# Altium PCB 矩形板V1.0.pcbdoc (part 2 of 2)
Units mm, origin at the board's own origin, x right, y up, seen from the top; angles counter-clockwise.
Board outline 153.82 x 190.84 mm, 2 copper layers (Top Layer, Bottom Layer); 147 components, 203 nets, 678 pads, 268 vias.
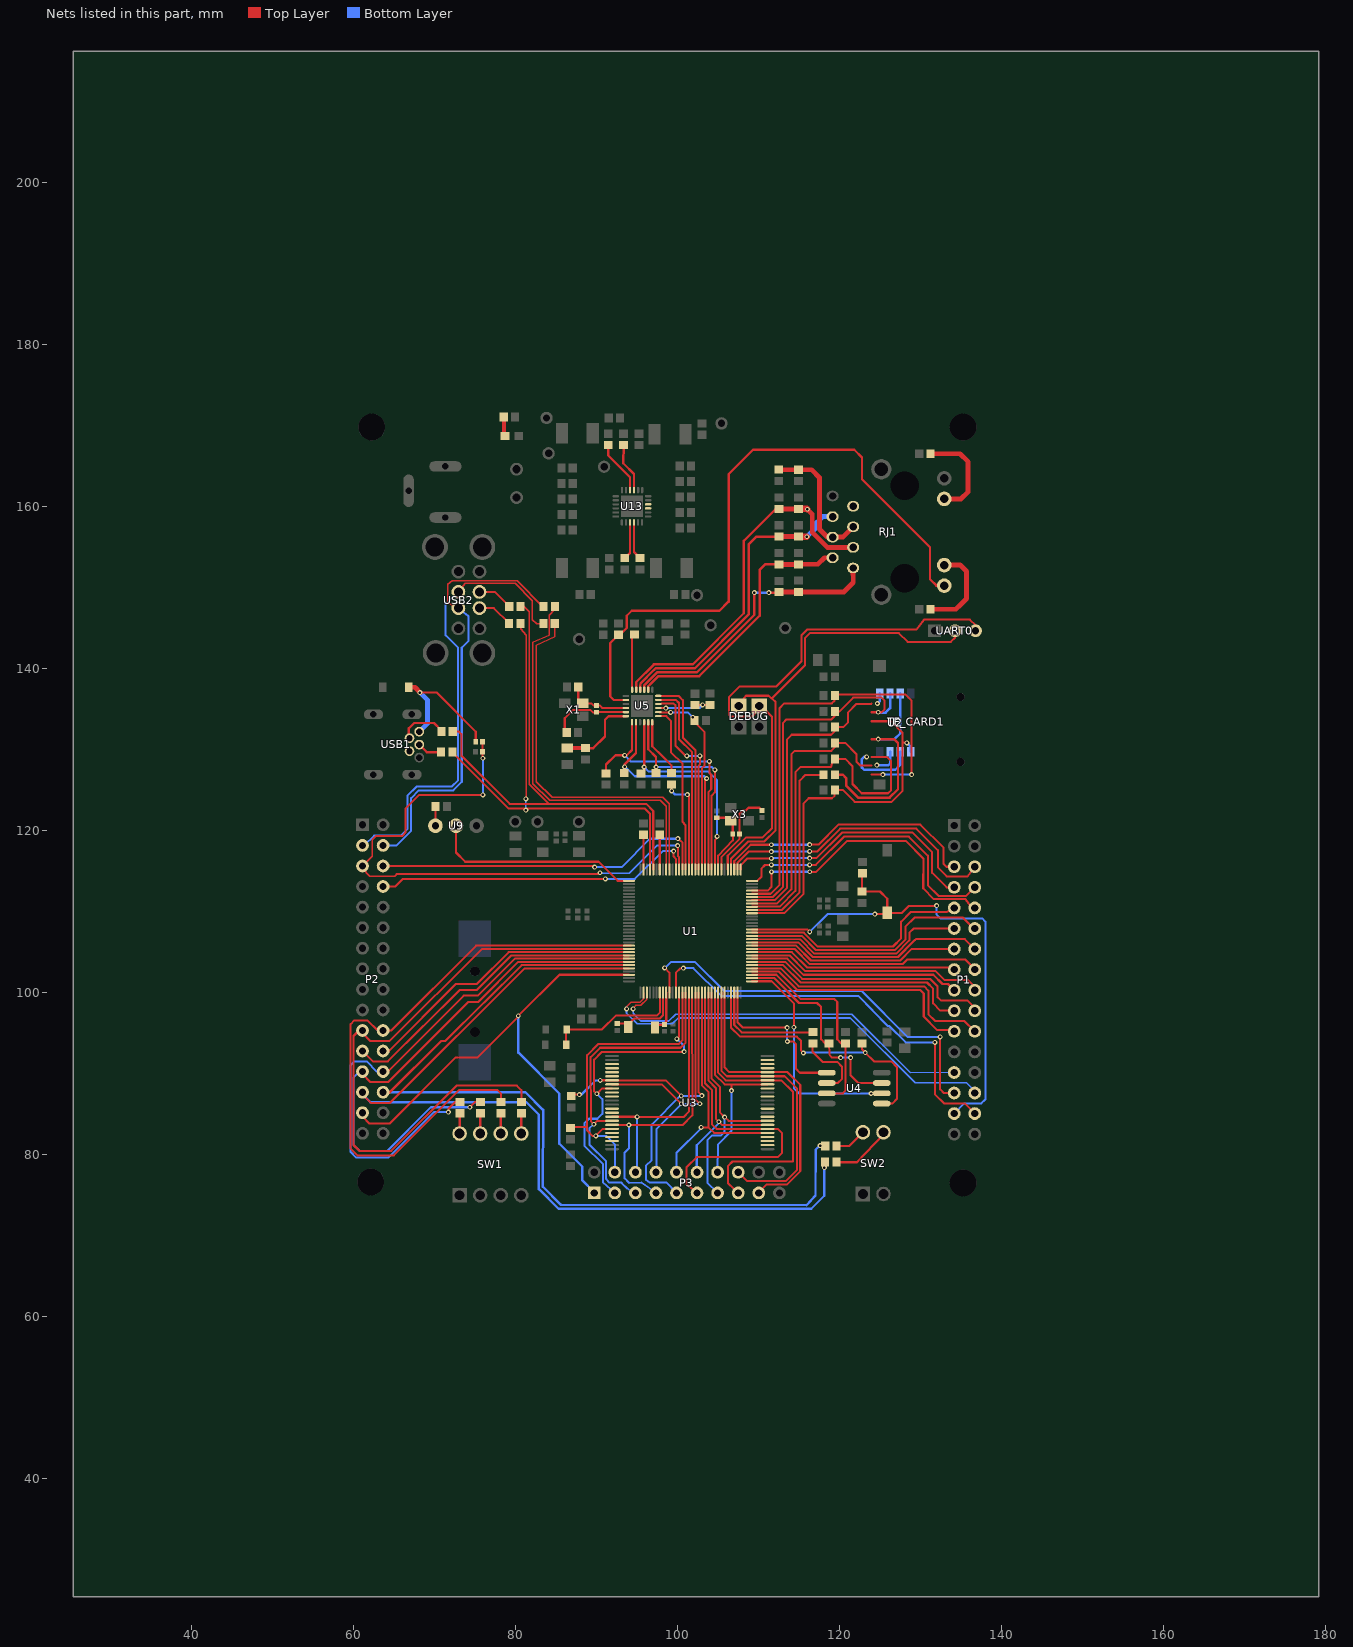
[diagram p2: the nets of this part, all layers, seen from the top]

## Via types
v1: diameter 0.61, hole 0.305, Top Layer to Bottom Layer, 268 vias

## Nets (pads, with @x,y where several pads share a name; then routed paths per layer and width w, separated by ;. In a path a pad name is that pad's centre, name@x,y a point inside that pad or via, vN(x,y) a via of type N, cw(c..) or ccw(c..) an arc to the next point about the centre after c; other vN are vias at no path point) (continued)
PB5: P1.25 U1.35 | length 47
  Top Layer w0.2: v1(94.54,98) 94.54,98.1 94.76,98.32 94.86,98.42 95.48,98.42 96.22,99.16 U1.35@96.22,100
  Bottom Layer w0.2: v1(94.54,98) 94.539,97.441 94.94,97.019 95.461,96.499 98.941,96.499 99.779,97.339 121.541,97.339 128.758,90.121 P1.25@134.181,90.141
PB6: P2.29 P3.1 U1.30 | length 67.2
  Top Layer w0.254: P2.29@61.12,85.16 61.12,84.662 61.948,83.834 64.483,83.829 72.611,92 75.341,92 80.35,97.009 v1@80.35,97.121 ; v1(80.35,97.12) 80.365,97.12 85.446,102.201 U1.30@94.021,102.201
  Bottom Layer w0.3: v1@80.35,97.121 80.358,92.582 85.43,87.51 85.43,81.33 88.26,78.5 88.26,76.819 89.731,75.351 P3.1@89.73,75.27
PB7: P1.28 U1.34 | length 52.2
  Top Layer w0.2: v1(93.72,98) 93.721,98.259 94.29,98.83 95.41,98.83 95.821,99.242 U1.34@95.821,100
  Bottom Layer w0.2: v1(93.72,98) 93.721,97.459 95.039,96.141 99.38,96.141 100.099,96.859 121.341,96.859 121.661,96.562 129.37,88.851 135.707,88.851 136.959,87.601 P1.28@136.721,87.601
PB8: P1.27 U1.42 | length 49.9
  Top Layer w0.25: v1(98.42,103.06) 99.019,102.461 U1.42@99.019,100 ; v1(132.44,94.54) 132.44,88.04 132.88,87.6 P1.27@134.18,87.6
  Bottom Layer w0.25: v1@98.42,103.052 98.501,103.052 99.2,103.763 102.199,103.763 105.76,100.199 122.761,100.199 128.46,94.5 132.441,94.5 v1@132.441,94.54
PB13: P1.10 U1.93 | length 36.8
  Top Layer w0.254: U1.93@109.22,112.601 111.161,112.601 111.62,113.06 v1(111.62,114.9) ; v1(116.34,114.92) 117.14,114.919 120.96,118.739 128.199,118.739 130.376,116.565 130.36,112.869 131.676,111.541 135.58,111.541 136.345,110.459 P1.10@136.72,110.46
  Bottom Layer w0.254: v1(111.62,114.9) 111.64,114.92 v1(116.34,114.92)
PC0: P1.30 U1.44 | length 50.9
  Top Layer w0.25: U1.44@99.819,100 99.819,102.44 100.381,102.999 v1(100.74,103.02) ; v1(131.8,93.86) 131.801,87.441 132.921,86.321 135.499,86.321 136.761,85.061 P1.30@136.721,85.061
  Bottom Layer w0.25: v1(100.74,103.02) 101.961,103.019 105.4,99.6 122.354,99.6 125.994,95.879 126.161,95.879 128.18,93.86 v1(131.8,93.86)
PC1: P3.3 U1.45 U3.9 | length 41.5
  Top Layer w0.25: U3.9@91.93,88.17 90.711,88.17 90.066,87.507 89.72,87.812 89.714,91.72 90.632,92.649 100.759,92.649 v1(100.82,92.71) ; v1(99.94,94.29) 100.222,94.573 U1.45@100.222,100.007
  Bottom Layer w0.25: v1@90.066,87.507 90.729,86.839 90.729,85.028 90.122,84.421 89.09,84.421 88.519,83.849 88.511,81.086 90.8,78.853 90.8,76.595 P3.3@92.27,75.27 ; v1(99.94,94.29) 100.82,93.41 v1(100.82,92.71)
  other v1: 90.066,87.507
PC2: P3.4 R29.2 U1.46 U3.19 | length 39.8
  Top Layer w0.25: R29.2@86.675,83.4 88.811,83.4 ; U3.19@91.93,83.17 90.788,83.17 v1(89.929,82.31) 89.51,82.31 88.849,82.971 88.849,92.28 90.221,93.649 100.17,93.649 100.622,94.101 U1.46@100.622,100.006
  Bottom Layer w0.25: v1(89.929,82.31) 91.209,82.31 92.271,81.251 P3.4@92.27,77.81
PC3: P3.5 U1.47 U3.17 | length 41.6
  Top Layer w0.25: U3.17@91.93,84.17 90.1,84.17 v1(89.675,83.745) 89.306,84.114 89.294,92.033 90.449,93.189 100.381,93.189 101.023,93.829 U1.47@101.023,100.006
  Bottom Layer w0.25: v1@89.675,83.745 89.139,83.227 89.139,81.241 91.191,79.189 91.191,77.024 91.575,76.537 93.071,76.539 93.152,76.468 93.84,75.78 94.694,75.269 P3.5@94.81,75.27
PC4: P3.6 U1.48 U3.16 | length 31.4
  Top Layer w0.25: U3.16@91.93,84.67 95,84.67 v1(95.03,84.64) ; v1(95.03,84.64) 100.759,84.639 101.422,85.302 U1.48@101.422,100.006
  Bottom Layer w0.25: P3.6@94.81,77.81 95.03,78.03 v1(95.03,84.64)
PC5: P3.7 U1.49 U3.18 | length 36.9
  Top Layer w0.25: U3.18@91.93,83.67 94,83.67 v1(94.02,83.65) ; v1(94.02,83.65) 100.673,83.649 101.839,84.845 U1.49@101.823,100.004
  Bottom Layer w0.25: v1(94.02,83.65) 94.02,80.791 93.48,80.25 93.48,77.05 94.023,76.517 95.588,76.522 P3.7@97.35,75.27
PC6: P3.8 U1.50 U3.8 | length 35.5
  Top Layer w0.25: U3.8@91.93,88.67 98.08,88.67 v1(100.479,86.271) ; U1.50@102.221,100.007 102.221,86.814 v1(102.765,86.271)
  Bottom Layer w0.25: P3.8@97.35,77.81 97.39,77.85 97.39,83.11 100.479,86.199 v1(100.479,86.271) v1(102.765,86.271)
PC7: P3.9 R28.1 U1.51 U3.7 | length 47.3
  Top Layer w0.25: R28.1@86.89,87.225 87.079,87.414 v1(87.906,87.414) ; U3.7@91.93,89.17 98.551,89.17 v1@100.479,87.243 ; U1.51@102.623,100.007 102.623,87.683 v1(103.019,87.287)
  Top Layer w0.3: v1(90.47,89.16) 90.48,89.17 U3.7@91.93,89.17
  Bottom Layer w0.25: v1(87.906,87.414) 88.16,87.414 89.906,89.16 v1(90.47,89.16) ; P3.9@99.89,75.27 98.636,76.56 96.571,76.56 96.111,76.88 96.111,78.599 96.82,79.31 96.82,83.689 100.373,87.243 v1(100.479,87.243) ; v1@100.479,87.243 102.975,87.243 v1(103.019,87.287)
PC8: P3.10 U1.52 U3.29 | length 32.3
  Top Layer w0.25: v1(102.93,83.36) 103.83,83.36 ; U1.52@103.022,100.006 103.022,88.554 103.83,87.746 103.83,83.359 104.529,82.671 U3.29@111.13,82.671
  Bottom Layer w0.25: P3.10@99.89,77.81 99.89,80.21 102.93,83.249 v1(102.93,83.36)
PC9: P3.11 U1.53 U3.30 | length 44.5
  Top Layer w0.25: P3.11@102.43,75.27 101.14,76.301 101.14,78.46 102.367,79.689 112.387,79.689 112.931,80.23 112.931,82.61 112.37,83.169 U3.30@111.13,83.17 104.838,83.169 104.29,83.692 104.29,87.921 103.424,88.777 U1.53@103.424,100.006
PC10: P3.12 U1.54 U3.31 | length 30.1
  Top Layer w0.25: U1.54@103.822,100.006 103.822,89.15 104.75,88.221 104.75,84.41 v1(105.11,84.05) 105.49,83.67 U3.31@111.13,83.67
  Bottom Layer w0.25: P3.12@102.43,77.81 102.39,77.85 102.39,81.149 105.11,83.87 v1(105.11,84.05)
PC11: P3.13 U1.55 U3.32 | length 32.9
  Top Layer w0.25: U1.55@104.224,100.006 104.219,89.387 105.24,88.368 105.24,85.2 v1(105.82,84.62) ; v1(105.82,84.62) 106.327,84.17 U3.32@111.13,84.17
  Bottom Layer w0.25: P3.13@104.97,75.27 103.7,76.509 103.7,81.79 104.249,82.341 105.349,82.341 105.82,82.812 v1(105.82,84.62)
PC12: P3.14 U1.56 U3.41 | length 28.7
  Top Layer w0.25: U1.56@104.622,100.007 104.622,89.875 105.827,88.67 U3.41@111.13,88.67 ; v1(106.68,87.89) 106.691,87.901 106.691,88.67
  Bottom Layer w0.25: P3.14@104.97,77.81 104.991,81.231 106.68,82.92 v1(106.68,87.89)
PC13: P3.15 U1.57 U3.42 | length 40.8
  Top Layer w0.25: U1.57@105.023,100.007 105.023,90.108 105.961,89.17 U3.42@111.13,89.17 112.85,89.171 114.272,87.746 114.249,79.14 106.807,79.14 106.271,78.599 106.271,76.42 P3.15@107.51,75.27
PC14: P3.16 U1.58 U3.43 | length 38.2
  Top Layer w0.25: U1.58@105.422,100.007 105.422,90.345 106.097,89.67 U3.43@111.13,89.67 ; P3.16@107.51,77.81 108.61,76.72 113.37,76.72 114.78,78.129 114.78,88.14 113.251,89.669 U3.43@111.13,89.67
PC15: P3.17 U1.59 U3.44 | length 36.4
  Top Layer w0.25: U1.59@105.824,100.006 105.824,90.748 106.402,90.17 U3.44@111.13,90.17 ; P3.17@110.01,75.269 111.049,76.311 113.54,76.311 115.171,77.941 115.171,88.599 113.599,90.169 U3.44@111.13,90.17
PD8: P1.21 U1.68 | length 29.8
  Top Layer w0.254: U1.68@109.22,102.6 112.522,102.6 114.8,100.319 129.987,100.319 130.419,99.892 130.419,97.047 132.09,95.361 134.181,95.361 P1.21@134.181,95.221
PD9: P1.22 U1.69 | length 32.4
  Top Layer w0.254: U1.69@109.22,103.001 112.761,103.001 114.981,100.779 130.462,100.779 131,100.24 131,97.339 131.841,96.499 135.44,96.499 P1.22@136.72,95.22
PD10: P1.19 U1.70 | length 28.4
  Top Layer w0.254: U1.70@109.22,103.4 113.06,103.4 115.219,101.241 130.818,101.241 131.58,100.479 131.58,98.663 132.443,97.764 P1.19@134.18,97.76
PD11: P1.20 U1.71 | length 31
  Top Layer w0.254: U1.71@109.22,103.801 113.299,103.801 115.4,101.701 131.199,101.701 132.141,100.758 132.141,99.42 132.56,99.001 135.839,99.001 136.721,98.119 P1.20@136.72,97.76
PD12: P1.17 U1.72 | length 26.6
  Top Layer w0.254: U1.72@109.22,104.2 113.579,104.18 115.56,102.201 131.6,102.201 132.74,101.061 133.421,101.061 P1.17@134.18,100.3
PD13: P1.18 U1.73 | length 29.5
  Top Layer w0.254: U1.73@109.22,104.601 113.84,104.601 115.781,102.661 131.879,102.661 132.969,101.571 135.829,101.571 136.7,100.7 P1.18@136.72,100.3
PD14: P1.15 U1.74 | length 25.9
  Top Layer w0.254: U1.74@109.22,105 114.14,105 116.04,103.1 133.919,103.1 P1.15@134.18,102.84
PD15: P1.16 U1.75 | length 29.2
  Top Layer w0.254: U1.75@109.22,105.401 114.46,105.399 116.34,103.519 127.8,103.519 128.359,104.081 135.583,104.081 136.807,102.839 P1.16@136.72,102.84
PE10: P2.6 U1.115 | length 42
  Top Layer w0.254: P2.6@63.66,115.64 89.64,115.64 v1(89.78,115.5) ; v1@100.061,119.021 v1(100.06,119.02) 100.62,118.56 U1.115@100.619,115.201
  Bottom Layer w0.254: v1@89.781,115.5 93.126,115.5 96.606,119.001 v1@100.061,119.001
PE11: P2.5 R68.1 R69.2 U1.116 | length 72.3
  Top Layer w0.24: R69.2@75.924,129.74 75.924,128.995 v1(75.98,128.94) ; v1(75.979,124.421) 68.141,124.421 66.421,122.699 66.421,119.821 66.045,119.341 62.801,119.341 62.319,118.858 62.319,116.864 61.12,115.64 61.12,115.279 62.029,114.37 65.09,114.37 65.339,114.619 90.259,114.619 v1(90.44,114.8)
  Top Layer w0.254: R69.2@75.924,129.74 75.924,130.96 R68.1@75.944,130.98 ; v1(100.02,118.16) 100.081,118.16 100.081,116.849 100.221,116.697 U1.116@100.221,115.201
  Bottom Layer w0.24: v1(75.979,124.421) v1(75.98,128.94) ; v1(90.44,114.8) 90.5,114.74 94.06,114.74 97.22,117.9 97.46,118.16 v1(100.02,118.16)
PE12: P2.8 U1.117 | length 40.1
  Top Layer w0.254: P2.8@63.66,113.1 65.18,113.1 66.12,114.04 v1(91.1,114.04) ; v1(99.54,117.48) 99.54,116.801 99.819,116.521 U1.117@99.819,115.201
  Bottom Layer w0.254: v1(91.1,114.04) 94.744,114.04 98.204,117.479 v1(99.54,117.48)
PF7: P1.8 U1.96 | length 36
  Top Layer w0.254: U1.96@109.22,113.801 109.88,113.801 110.36,114.279 110.36,115.3 110.82,115.759 v1(111.6,115.76) ; v1(116.32,115.78) 117.099,115.78 120.579,119.26 128.57,119.26 130.919,116.91 130.919,113.26 132.24,111.939 135.659,111.939 P1.8@136.72,113
  Bottom Layer w0.254: v1(111.6,115.76) 116.3,115.76 v1(116.32,115.78)
PF8: P1.7 U1.97 | length 32.9
  Top Layer w0.254: U1.97@107.82,115.201 107.82,115.739 108.659,116.58 v1(111.6,116.58) ; v1@116.319,116.6 117.16,116.6 120.32,119.76 129.04,119.76 131.46,117.339 131.46,114.799 133.261,112.999 P1.7@134.18,113
  Bottom Layer w0.254: v1(111.6,116.58) 111.62,116.6 v1(116.32,116.6)
PF9: P1.6 U1.98 | length 36.1
  Top Layer w0.254: U1.98@107.419,115.201 107.419,116.019 108.821,117.421 v1@111.6,117.421 ; v1@116.319,117.441 117.3,117.441 120.099,120.24 129.509,120.24 132.159,117.591 132.159,115.46 133.261,114.36 135.844,114.36 P1.6@136.72,115.54
  Bottom Layer w0.254: v1(111.6,117.42) 116.3,117.42 v1(116.32,117.44)
PF10: P1.5 U1.99 | length 33.4
  Top Layer w0.254: U1.99@107.02,115.201 107.02,116.24 109.04,118.259 v1(111.6,118.26) ; v1(116.32,118.28) 117.419,118.279 119.88,120.74 130.01,120.74 132.88,117.87 132.88,115.879 133.22,115.539 P1.5@134.18,115.54
  Bottom Layer w0.254: v1(111.6,118.26) 116.3,118.26 v1(116.32,118.28)
PG0: P2.27 R18.1 U1.28 | length 113.9
  Top Layer w0.254: P2.27@61.12,87.7 61.12,87.4 62.146,86.374 64.506,86.374 81.168,103.001 U1.28@94.021,103.001
  Top Layer w0.3: v1(118.14,78.381) 118.24,78.48 R18.1@118.24,79.06
  Bottom Layer w0.3: P2.27@61.12,87.7 61.12,87.421 62.08,86.461 81.351,86.461 82.89,84.919 82.89,75.739 85.319,73.311 116.522,73.311 118.14,74.909 v1(118.14,78.381)
PG1: P2.28 R19.1 U1.27 | length 109.6
  Top Layer w0.254: P2.28@63.66,87.7 63.66,87.601 64.384,87.601 70.818,94.02 71.328,94.02 80.774,103.4 U1.27@94.021,103.4
  Top Layer w0.3: v1(117.62,81.1) 117.66,81.06 R19.1@118.26,81.06
  Bottom Layer w0.3: P2.28@63.66,87.7 81.229,87.7 83.408,85.523 83.391,76.029 85.641,73.781 115.941,73.73 117.053,74.934 117.063,80.596 117.574,81.099 v1(117.62,81.1) ; v1(117.62,81.1) v1@117.899,81.099
PG3: P2.25 R61.1 U1.26 | length 68
  Top Layer w0.254: P2.25@61.12,90.24 61.12,89.92 62.08,88.96 64.313,88.96 74.176,98.841 75.405,98.841 80.34,103.801 U1.26@94.021,103.801 ; v1(74.38,85.84) 75.04,86.5 R61.1@75.66,86.5
  Bottom Layer w0.25: P2.25@61.12,90.24 60.719,90.24 60.02,89.539 60.02,81.172 60.772,80.441 64.16,80.441 69.56,85.841 v1@74.379,85.841
PG5: P2.26 R60.1 U1.25 | length 68.4
  Top Layer w0.254: P2.26@63.66,90.24 64.221,90.24 73.604,99.623 75.339,99.618 79.934,104.2 U1.25@94.021,104.2 ; v1(71.72,85.24) 71.72,85.62 71.92,85.82 72.6,86.5 R60.1@73.14,86.5
  Bottom Layer w0.25: P2.26@63.66,90.25 62.88,90.25 61.625,91.5 60.096,91.5 59.659,91.061 59.659,80.316 60.363,79.62 64.3,79.62 69.921,85.239 v1(71.72,85.24)
PG6: P2.23 U1.24 | length 38.9
  Top Layer w0.254: P2.23@61.12,92.78 62.4,91.5 64.254,91.5 73.111,100.319 75.24,100.319 79.51,104.601 U1.24@94.021,104.601
PG7: P2.24 U1.23 | length 35.4
  Top Layer w0.254: P2.24@63.66,92.78 64.341,92.78 72.621,101.061 75.219,101.061 79.151,105 U1.23@94.021,105
PG8: P2.21 R62.1 U1.22 | length 79.2
  Top Layer w0.254: R62.1@80.74,86.5 80.739,87.939 80.162,88.521 72.72,88.521 64.661,80.459 60.739,80.459 60,81.18 60,94.639 60.681,95.32 61.12,95.32 61.12,94.959 62.039,94.04 64.465,94.04 75.88,105.401 U1.22@94.021,105.401
PG9: P2.22 R63.1 U1.21 | length 78.6
  Top Layer w0.25: P2.22@63.66,95.32 62.979,95.32 61.719,96.58 60.119,96.58 59.639,96.1 59.639,80.741 60.49,79.89 64.976,79.89 73.066,88 77.777,88 78.199,87.563 R63.1@78.199,86.501
  Top Layer w0.254: P2.22@63.66,95.32 64.643,95.32 75.143,105.8 U1.21@94.28,105.8
PG11: P1.13 U1.76 | length 26.3
  Top Layer w0.254: U1.76@109.22,105.8 114.661,105.8 116.5,103.959 127.521,103.959 128.961,105.399 P1.13@134.18,105.38
PG12: P1.14 U1.77 | length 29.7
  Top Layer w0.254: U1.77@109.22,106.2 114.86,106.2 114.919,106.2 116.72,104.4 127.1,104.4 127.24,104.4 129.16,106.32 129.34,106.5 129.44,106.6 135.44,106.6 135.5,106.6 P1.14@136.72,105.38
PG13: P1.11 U1.78 | length 27.5
  Top Layer w0.254: U1.78@109.22,106.6 115.161,106.58 116.919,104.82 127.02,104.82 128.641,106.44 128.641,107.39 129.169,107.921 P1.11@134.18,107.92
PG14: P1.12 U1.79 | length 31.4
  Top Layer w0.254: U1.79@109.22,107.002 115.359,106.999 117.119,105.239 126.84,105.239 128.14,106.539 128.14,108.119 129.281,109.26 135.265,109.26 136.601,107.919 P1.12@136.72,107.92
PG15: P1.9 U1.80 | length 28.8
  Top Layer w0.254: U1.80@109.22,107.4 115.6,107.4 117.279,105.699 126.619,105.699 127.62,106.699 127.62,108.749 128.788,109.94 133.279,109.94 P1.9@134.181,110.479
R9_2: LED4.1 R9.2 | length 2.4
  Top Layer w0.5: R9.2@78.56,171.09 78.56,168.899 LED4.1@78.699,168.76
R60_2: R60.2 SW1.8 | length 2.5
  Top Layer w0.3: SW1.8@73.1,82.6 73.1,85.06 R60.2@73.14,85.1
R61_2: R61.2 SW1.7 | length 2.5
  Top Layer w0.3: SW1.7@75.64,82.6 75.66,82.62 R61.2@75.66,85.1
R62_2: R62.2 SW1.5 | length 2.5
  Top Layer w0.3: SW1.5@80.72,82.6 80.72,85.08 R62.2@80.74,85.1
R63_2: R63.2 SW1.6 | length 2.5
  Top Layer w0.3: SW1.6@78.18,82.6 78.18,85.08 R63.2@78.2,85.1
RESET: C50.2 P1.29 R64.1 S1.2 U1.81 | length 65.8
  Top Layer w0.25: S1.2@125.919,109.852 127.731,109.851 128.6,110.72 v1@132.019,110.72
  Top Layer w0.26: U1.81@109.222,107.807 113.627,107.807 116.032,107.807 v1(116.34,107.5) ; v1(124.396,109.689) 125.756,109.689 S1.2@125.919,109.852
  Top Layer w0.3: R64.1@122.796,112.489 125.011,112.488 125.918,111.581 S1.2@125.919,109.852 ; R64.1@122.796,112.489 122.796,114.688 C50.2@122.846,114.739
  Bottom Layer w0.25: v1@132.019,110.74 132.019,109.62 132.479,109.161 137.62,109.161 138.021,108.759 138.021,86.801 137.538,86.331 135.433,86.331 P1.29@134.181,85.061
  Bottom Layer w0.26: v1(116.34,107.5) 118.539,109.689 v1(124.396,109.689)
  other v1: 132.02,110.74
RJ1_4: C42.1 R17.1 RJ1.4 RJ1.5 | length 16.9
  Top Layer w0.6: R17.1@112.544,164.568 C42.1@114.957,164.568 ; C42.1@114.957,164.569 116.567,164.569 117.545,163.588 117.545,157.238 118.538,156.248 RJ1.4@119.165,156.245 120.438,156.248 RJ1.5@121.705,157.515
RJ1_7: RJ1.7
RJ1_10: R46.2 RJ1.10 | length 11.1
  Top Layer w0.6: R46.2@131.26,147.34 134.398,147.34 134.896,147.838 135.696,148.638 135.696,152.039 134.937,152.798 RJ1.10@133.283,152.798
RJ1_11: R47.2 RJ1.11 | length 11.7
  Top Layer w0.6: R47.2@131.26,166.539 134.896,166.54 135.897,165.539 135.897,161.838 135.026,160.967 RJ1.11@133.283,160.967
RMIIOREFCLK: C23.2 U1.109 U5.14 | length 23.4
  Top Layer w0.254: U5.14@97.785,134.619 97.804,134.6 v1(99.16,134.6) ; C23.2@101.895,133.377 102.123,133.377 103.36,132.14 103.36,128.04 103.02,127.7 U1.109@103.02,115.201
  Bottom Layer w0.254: v1(99.16,134.6) 101.28,134.6 v1(101.9,133.98)
RMIOCRSDV: R36.2 U1.106 U5.11 | length 26.7
  Top Layer w0.254: U1.106@104.221,115.201 104.22,124.32 104.62,124.72 v1(104.62,127.5)
  Top Layer w0.28: U5.11@96.395,133.489 96.395,130.065 97.361,129.1 v1(97.361,127.86) R36.2@97.361,127.101
  Bottom Layer w0.254: v1@97.361,127.86 104.26,127.86 v1(104.62,127.5)
RMIOMDC: U1.114 U5.13 | length 21
  Top Layer w0.254: U5.13@97.546,134.139 98.621,134.139 99.2,133.56 99.2,129.699 100.637,128.261 100.637,121.086 101,120.639 U1.114@101.021,115.201
RMIOMDIO: R43.1 U1.113 | length 12.3
  Top Layer w0.254: v1(99.28,124.9) R43.1@99.28,125.7 ; v1(101.24,124.44) 101.419,124.26 U1.113@101.419,115.199
  Bottom Layer w0.254: v1(99.28,124.9) 99.28,124.88 99.7,124.46 101.22,124.46 v1(101.24,124.44)
RMIORXD0: R34.2 U1.108 U5.8 | length 29
  Top Layer w0.254: U1.108@103.421,115.201 103.421,126.224 v1@103.599,126.44
  Top Layer w0.28: R34.2@93.439,127.101 93.48,127.139 v1(93.48,127.88) 93.48,128.167 94.892,129.577 U5.8@94.897,133.489
  Bottom Layer w0.254: v1@93.48,127.88 93.581,127.88 94.739,126.72 103.32,126.72 v1@103.599,126.44
  other v1: 103.6,126.44
RMIORXD1: R35.2 U1.107 U5.7 | length 32.9
  Top Layer w0.254: U1.107@103.82,115.201 103.82,124.759 104.181,125.122 104.181,126.905 103.96,127.156 v1@103.96,128.561
  Top Layer w0.28: R35.2@91.18,127.08 91.18,127.9 91.18,128.152 92.351,129.324 93.748,129.324 94.383,129.959 94.396,129.971 U5.7@94.396,133.489
  Bottom Layer w0.254: v1@93.48,129.3 94.239,128.541 v1@103.96,128.561
  other v1: 103.96,128.56 93.48,129.3
RMIORXER: R37.2 U1.105 U5.10 | length 27.4
  Top Layer w0.254: U1.105@104.62,115.201 104.62,118.82 104.899,119.1 v1@104.899,119.3
  Top Layer w0.28: R37.2@95.5,127.08 95.896,127.476 v1(95.896,127.86) U5.10@95.896,133.489
  Bottom Layer w0.254: v1@95.895,127.86 96.479,127.281 103.82,127.281 104.899,126.201 v1@104.899,119.3
  other v1: 104.9,119.3
RMIOTXD0: U1.112 U5.17 | length 23.9
  Top Layer w0.254: U5.17@97.64,136.141 99.818,136.141 100.2,135.759 100.2,131.299 101.821,129.679 U1.112@101.821,115.201
RMIOTXD1: U1.111 U5.18 | length 24.8
  Top Layer w0.254: U5.18@97.64,136.642 100.138,136.642 100.68,136.1 100.68,131.5 102.22,129.961 U1.111@102.22,115.201
RMIOTXEN: U1.110 U5.16 | length 24.9
  Top Layer w0.254: U5.16@97.546,135.638 98.04,135.68 99.54,135.68 99.761,135.46 99.761,130.479 101,129.239 v1(101.16,129.24) ; U1.110@102.621,115.201 102.621,128.007 102.78,128.166 v1(102.78,129.24)
  Bottom Layer w0.254: v1(101.16,129.24) v1(102.78,129.24)
RTCVD: D4.2 D5.2 U1.39 | length 16.8
  Top Layer w0.25: D5.2@86.25,93.56 86.25,95.38 D4.2@86.31,95.44 ; D4.2@86.31,95.44 90.68,95.439 92.441,97.2 97.498,97.2 97.823,97.522 U1.39@97.823,100.006
RXD0: DEBUG.c U1.100 UART0.2 | length 59.2
  Top Layer w0.25: 111.646,136.313 115.781,140.458 115.781,143.799 116.36,144.38 127.34,144.38 128.42,143.301 133.779,143.301 134.28,143.799 UART0.2@134.28,144.68
  Top Layer w0.254: U1.100@106.622,115.201 106.622,116.547 106.68,116.6 108.74,118.66 110.721,118.66 112.121,120.06 112.121,135.881 111.262,136.659 108.448,136.659 107.528,135.381 DEBUG.c@107.579,135.381
RXN: C38.1 R40.1 RJ1.6 U5.22 | length 38.6
  Top Layer w0.3: U5.22@95.396,137.288 95.396,137.939 95.446,137.989 95.446,138.189 97.146,139.889 97.296,140.039 98.246,140.039 102.146,140.039 108.796,146.689 108.796,155.339 109.767,156.309 R40.1@112.544,156.309
  Top Layer w0.6: R40.1@112.544,156.309 C38.1@114.957,156.309
  Top Layer w0.8: C38.1@114.957,156.309 114.978,156.288 v1(115.996,156.288)
  Bottom Layer w0.6: v1(115.996,156.288) 117.196,157.488 117.196,158.039 117.942,158.785 RJ1.6@119.165,158.785
RXP: C37.1 R38.1 RJ1.3 U5.23 | length 45.3
  Top Layer w0.3: U5.23@94.896,137.288 94.896,138.331 97.103,140.539 101.896,140.539 108.196,146.839 108.196,155.789 112.146,159.738 R38.1@112.544,159.738
  Top Layer w0.6: R38.1@112.544,159.738 C37.1@114.957,159.738 ; v1@116.047,159.689 116.646,159.087 116.646,156.839 118.51,154.975 RJ1.3@121.705,154.975
  Top Layer w0.8: C37.1@114.957,159.738 115.996,159.738 v1(116.046,159.689)
S$19: 
S$28: 
S$30: 
S$44: 
S$47: 
S$49: 
S$53: 
S$55: 
S$67: 
S$69: 
S$71: 
S$73: 
S$77: 
S$79: 
S$81: 
S$2331: 
SD_CD: R24.1 TF_CARD1.9 U1.92 | length 57.6
  Top Layer w0.25: U1.92@109.222,112.206 111.514,112.206 112.58,113.273 112.58,135.081 113.22,135.719 119.07,135.719 119.4,136.052 119.4,136.72 119.4,136.839 128.143,136.839 128.928,136.054 v1(128.927,126.911) ; TF_CARD1.9@123.974,126.911 v1(125.371,126.911)
  Bottom Layer w0.25: v1(125.371,126.911) v1(128.927,126.911)
SD_CLK: R15.1 U1.87 | length 23.8
  Top Layer w0.25: U1.87@109.222,110.207 112.916,110.207 115.085,112.376 115.085,126.163 115.819,126.9 R15.1@118.039,126.9
SD_CLK-P: R15.2 TF_CARD1.5 U2.3 | length 27
  Top Layer w0.3: R15.2@119.46,126.9 120.439,126.9 120.84,126.499 120.84,125.559 122.319,124.081 126.2,124.081 127.239,125.119 127.239,130.819 126.759,131.299 v1(124.8,131.299) 123.975,131.299
  Bottom Layer w0.3: v1@124.79,131.299 126.799,131.299 127.536,132.033 U2.3@127.536,136.941
SD_CMD: R72.1 TF_CARD1.3 U1.86 U2.5 | length 46.6
  Top Layer w0.25: U1.86@109.222,109.806 113.215,109.806 115.593,112.183 115.6,123.377 116.218,123.999 119.06,123.999 119.4,124.253 119.403,125.079 119.441,125.041 120.439,125.041 121.897,123.562 126.464,123.557 127.785,124.878 127.785,132.117 126.393,133.509 TF_CARD1.3@123.974,133.51 ; 127.785,130.88 128.299,130.88 v1(128.34,130.84)
  Bottom Layer w0.3: v1(128.34,130.84) 128.805,130.375 U2.5@128.805,129.74
SD_D0: R71.1 TF_CARD1.7 U1.88 U2.6 | length 51.7
  Top Layer w0.25: U1.88@109.222,110.606 112.613,110.606 114.577,112.569 114.577,127.215 115.24,127.88 118.953,127.878 119.276,129.044 119.461,128.861 120.724,128.861 121.62,127.959 121.62,125.759 122.756,124.616 126.007,124.616 126.388,124.997 126.388,128.553 125.839,129.11 TF_CARD1.7@123.974,129.11
  Bottom Layer w0.3: v1@123.36,129.12 123.058,129.117 122.781,128.84 122.781,127.779 123.04,127.52 126.901,127.52 127.419,128.04 127.536,128.134 U2.6@127.535,129.74
  other v1: 123.36,129.12
SD_D1: R70.1 TF_CARD1.8 U1.89 U2.7 | length 38
  Top Layer w0.25: U1.89@109.222,111.008 112.315,111.008 114.068,112.76 114.068,129.448 114.48,129.86 119,129.86 119.44,130.3 R70.1@119.44,130.84 ; R70.1@119.441,130.839 120.746,130.839 122.121,129.458 122.118,128.495 122.608,128.02 123.975,128.02
  Bottom Layer w0.3: v1(124.64,128.08) 126.06,128.08 126.265,128.285 U2.7@126.265,129.74
SD_D2: R26.1 TF_CARD1.1 U1.90 U2.1 | length 37.9
  Top Layer w0.25: U1.90@109.222,111.406 112.027,111.406 113.561,112.94 113.561,131.279 114.12,131.84 118.981,131.84 119.421,132.28 R26.1@119.421,132.78 ; R26.1@119.42,132.78 120.34,132.78 120.48,132.78 121.04,133.34 121.04,134.58 122.1,135.64 123.903,135.64 TF_CARD1.1@123.974,135.711
  Bottom Layer w0.3: v1(124.7,135.7) 124.995,135.995 U2.1@124.995,136.94
SD_D3: R25.1 TF_CARD1.2 U1.91 U2.2 | length 45.3
  Top Layer w0.25: U1.91@109.222,111.808 111.792,111.808 113.052,113.068 113.052,133.312 113.46,133.72 118.98,133.72 119.42,134.16 R25.1@119.42,134.7 ; R25.1@119.421,134.7 119.979,134.7 121.699,136.42 125.207,136.42 125.6,136.049 125.6,135 125.219,134.619 v1(124.8,134.619) 123.975,134.619
  Bottom Layer w0.3: v1@124.699,134.581 125.72,134.581 126.266,135.124 U2.2@126.266,136.941
SPEED_LED: R48.2 RJ1.9 U5.2 | length 81.1
  Top Layer w0.28: R48.2@92.745,144.191 91.716,143.162 91.716,142.786 91.716,136.563 92.147,136.131 U5.2@93.64,136.131
  Top Layer w0.3: R48.2@92.745,144.192 92.898,144.192 93.746,145.038 93.746,146.539 94.366,147.159 105.199,147.159 106.319,148.279 106.319,164.012 109.347,167.04 121.846,167.04 122.796,166.09 122.796,163.39 131.196,154.99 131.196,151.038 131.976,150.258 RJ1.9@133.281,150.258
SPI_CLK: R16.2 U1.62 | length 14
  Top Layer w0.254: U1.62@107.02,100 107.02,96 107.94,95.08 R16.2@116.68,95.08
SPI_CS: R30.1 U1.61 U4.1 | length 34.9
  Top Layer w0.254: U1.61@106.621,100 106.621,95.678 107.74,94.56 114.76,94.56 115.24,94.08 115.24,92.86 v1(115.56,92.54) ; R30.1@122.8,93.7 122.799,92.981 v1(123.2,92.58) 124.28,91.5 126.421,91.5 127.119,90.799 127.119,86.9 126.515,86.296 U4.1@125.24,86.296
  Bottom Layer w0.254: v1(115.56,92.54) 115.6,92.58 v1(123.2,92.58)
SPI_D3: R31.1 U1.67 U4.7 | length 26.1
  Top Layer w0.254: U1.67@109.22,102.201 112.22,102.201 115.219,99.199 119.4,99.199 119.741,98.861 119.741,94.22 120.241,93.72 R31.1@120.78,93.72 120.78,87.92 120.425,87.565 U4.7@118.44,87.565
SPI_DI: U1.65 U4.2 | length 27.9
  Top Layer w0.254: U1.65@109.22,101.401 111.641,101.401 114.381,98.66 v1@114.381,95.719 ; v1(123.919,87.54) 123.944,87.565 U4.2@125.24,87.565
  Bottom Layer w0.254: v1(114.38,95.72) 114.379,88.2 115.039,87.54 v1(123.919,87.54)
SPI_DO: U1.63 U4.5 | length 20
  Top Layer w0.254: U1.63@107.419,100 107.419,96.361 108.1,95.68 v1(113.56,95.68) ; v1(113.58,93.96) 114.361,93.941 114.661,93.621 114.661,90.56 115.115,90.105 U4.5@118.44,90.105
  Bottom Layer w0.254: v1(113.56,95.68) 113.56,93.98 v1(113.58,93.96)
SPI_WP: R32.1 U1.66 U4.3 | length 25.8
  Top Layer w0.254: U1.66@109.22,101.802 111.938,101.802 115.019,98.719 117.239,98.719 117.739,98.221 117.739,94.22 118.239,93.72 R32.1@118.74,93.72 118.76,92.4 119.06,91.96 v1(120.16,91.96) ; v1(121.38,91.96) 121.38,89.78 122.08,89.08 122.325,88.835 U4.3@125.24,88.835
  Bottom Layer w0.254: v1(120.16,91.96) v1(121.38,91.96)
SW2_3: R18.2 SW2.3 | length 7.6
  Top Layer w0.3: R18.2@119.64,79.06 122.164,79.059 125.481,82.534 125.481,82.719 SW2.3@125.45,82.75
SW2_4: R19.2 SW2.4 | length 3.9
  Top Layer w0.3: R19.2@119.66,81.06 121.22,81.06 SW2.4@122.91,82.75
TXD0: DEBUG.a U1.101 UART0.3 | length 68.6
  Top Layer w0.25: DEBUG.a@110.12,135.38 109.281,134.081 106.545,134.081 106.36,134.286 106.36,136.481 107.658,137.779 112.179,137.779 115.321,140.921 115.321,144.121 116.04,144.84 129.517,144.84 130.439,146.059 136.121,146.059 136.82,145.361 UART0.3@136.82,144.68
  Top Layer w0.254: U1.101@106.22,115.201 106.22,116.9 108.481,119.161 110.52,119.161 111.679,120.319 111.661,134.098 110.442,135.378 DEBUG.a@110.12,135.38
TXN: C36.1 R42.1 RJ1.2 U5.20 | length 33.2
  Top Layer w0.3: U5.20@96.396,137.288 96.396,137.839 96.596,138.039 97.646,139.089 102.696,139.089 110.146,146.539 110.146,152.189 110.838,152.88 R42.1@112.544,152.88
  Top Layer w0.6: R42.1@112.544,152.88 C36.1@114.957,152.88 114.965,152.889 117.346,152.889 118.162,153.705 RJ1.2@119.165,153.705
TXP: C35.1 R41.1 RJ1.1 U5.21 | length 35.1
  Top Layer w0.3: U5.21@95.896,137.288 95.896,137.939 97.496,139.539 102.396,139.539 109.496,146.639 v1(109.496,149.389) ; v1(111.296,149.389) 112.481,149.389 R41.1@112.544,149.451
  Top Layer w0.6: R41.1@112.544,149.451 112.581,149.489 C35.1@114.946,149.489 ; C35.1@114.946,149.489 120.569,149.488 121.719,150.639 RJ1.1@121.705,152.435
  Bottom Layer w0.3: v1(109.496,149.389) v1(111.296,149.389)
U3_3: U3.3
U3_4: U3.4
U3_5: U3.5
U3_6: U3.6
U3_10: U3.10
U3_11: U3.11
U3_14: U3.14
U3_15: U3.15
U3_20: U3.20
U3_21: U3.21
U3_22: U3.22
U3_26: U3.26
U3_27: U3.27
U3_28: U3.28
U3_33: U3.33
U3_35: U3.35
U3_38: U3.38
U3_40: U3.40
U3_45: U3.45
U3_46: U3.46
U3_47: U3.47
U4_6: R16.1 U4.6 | length 9
  Top Layer w0.254: R16.1@116.68,93.679 116.68,92.681 117.919,91.439 119.741,91.439 120.299,90.88 120.299,89.321 119.814,88.835 U4.6@118.44,88.835
U5_6: C33.1 C34.1 U5.6 | length 10.1
  Top Layer w0.28: C34.1@88.645,130.19 89.595,130.19 91.045,131.637 91.045,133.69 91.488,134.132 U5.6@93.64,134.132
  Top Layer w0.5: C33.1@86.396,130.205 88.63,130.205 C34.1@88.646,130.189
U5_12: R43.2 U5.12 | length 7.4
  Top Layer w0.254: U5.12@96.896,133.489 96.896,130.424 98.22,129.1 99.1,128.22 99.28,128.04 R43.2@99.28,127.1
U5_15: C43.2 R14.1 U5.15 | length 8
  Top Layer w0.254: U5.15@97.546,135.138 97.547,135.14 v1(98.58,135.14)
  Top Layer w0.28: R14.1@101.846,135.389 101.977,135.52 v1(103.11,135.52) C43.2@104.02,135.52
  Bottom Layer w0.254: v1(98.58,135.14) 102.73,135.14 v1(103.11,135.52)
U5_24: R49.2 U5.24 | length 7
  Top Layer w0.28: U5.24@94.396,137.289 94.396,143.885 94.7,144.188 R49.2@94.7,144.2
U9_3: R20.1 U9.3 | length 2.4
  Top Layer w0.254: R20.1@70.116,122.96 70.116,120.604 U9.3@70.12,120.6
U13_9: R73.2 U13.9 | length 4.7
  Top Layer w0.28: R73.2@93.494,153.646 94.139,154.291 U13.9@94.14,158.057
U13_10: R11.2 U13.10 | length 4.7
  Top Layer w0.28: U13.10@94.638,158.057 94.637,154.408 R11.2@95.399,153.646
U13_15: U13.15
U13_16: U13.16
U13_21: R75.1 U13.21 | length 6.1
  Top Layer w0.28: R75.1@93.367,167.612 93.321,165.364 94.652,164.033 U13.21@94.653,162.057
U13_22: R74.1 U13.22 | length 6.7
  Top Layer w0.28: R74.1@91.462,167.612 91.447,166.336 94.154,163.631 U13.22@94.155,162.057
USB0_DM: R12.2 R53.2 U1.124 | length 65.5
  Top Layer w0.18: R53.2@80.64,147.7 81.039,147.7 81.699,147.04 81.699,125.724 84.13,123.301 82.265,123.301
  Top Layer w0.254: R12.2@72.26,132.22 73.02,132.219 73.32,131.919 73.32,129.28 79.299,123.301 96.139,123.301 97.02,122.419 U1.124@97.02,115.201
USB0_DP: R13.2 R54.2 U1.125 | length 58.6
  Top Layer w0.18: 80.64,122.76 80.92,122.76 81.15,122.53 v1(81.29,122.53) ; R54.2@80.68,145.599 80.68,144.944 81.321,144.139 81.321,123.95 v1(81.3,123.93)
  Top Layer w0.254: R13.2@72.146,129.689 72.146,129.735 79.121,122.76 95.941,122.76 96.619,122.079 U1.125@96.619,115.201
  Bottom Layer w0.18: v1(81.29,122.53) 81.3,122.54 v1(81.3,123.93)
USB0_ID: U1.1 U9.2 | length 26.1
  Top Layer w0.26: U9.2@72.659,120.601 72.659,117.301 73.8,116.161 90.279,116.161 92.639,113.801 U1.1@94.021,113.801
USB0_REXT: R51.2 U1.127 | length 4.3
  Top Layer w0.254: R51.2@95.819,119.494 U1.127@95.821,115.199
USB1_1: D6.1 R68.2 USB1.1 | length 17.5
  Top Layer w0.254: v1(68.196,137.038) 70.312,137.037 75.095,132.211 R68.2@75.096,130.98
  Top Layer w0.6: D6.1@66.845,137.7 67.599,137.7 68.262,137.037 v1(68.196,137.038)
  Bottom Layer w0.6: USB1.1@68.122,132.219 69.121,133.212 69.121,136.161 68.242,137.037 v1(68.196,137.038)
USB1_2: R12.1 USB1.2 | length 6.2
  Top Layer w0.3: USB1.2@66.918,131.419 66.847,131.49 66.847,132.638 67.497,133.288 69.946,133.288 70.845,132.389 R12.1@70.845,132.039
USB1_3: R13.1 USB1.3 | length 3
  Top Layer w0.3: USB1.3@68.122,130.619 69.052,129.689 R13.1@70.746,129.689
USB1_4: USB1.4
USB1_DM: R58.2 U1.119 | length 46.6
  Top Layer w0.18: R58.2@84.86,145.56 84.841,143.959 82.58,142.899 82.58,126.062 84.549,124.139 98.219,124.139 99.019,123.321 U1.119@99.019,115.201
USB1_DM_E: P2.3 R58.1 USB2.6 | length 56.7
  Top Layer w0.18: USB2.6@72.953,149.48 73.787,150.58 79.99,150.578 82.1,148.381 82.1,146.059 82.601,145.559 R58.1@83.46,145.56
  Bottom Layer w0.25: P2.3@61.12,118.18 61.349,118.18 62.54,119.369 65.839,119.369 66.65,120.179 66.65,124.312 67.793,125.45 72.133,125.45 72.921,126.222 72.931,142.569 71.369,144.129 71.369,148.007 72.674,149.27 72.743,149.27 USB2.6@72.953,149.48
USB1_DP: R59.2 U1.120 | length 48.9
  Top Layer w0.18: R59.2@84.88,147.66 84.879,147.339 84.16,146.62 84.16,144.101 82.159,143.26 82.159,125.81 84.209,123.76 97.861,123.76 98.621,122.998 U1.120@98.621,115.201
USB1_DP_E: P2.4 R59.1 USB2.7 | length 54.9
  Top Layer w0.18: USB2.7@72.953,147.479 72.763,147.479 71.62,148.18 71.62,150.425 72.22,150.88 80.241,150.88 83.396,147.659 R59.1@83.48,147.66
  Bottom Layer w0.25: P2.4@63.66,118.18 65.329,118.18 67.13,119.976 67.13,124.017 68.08,124.97 72.337,124.97 73.37,126.016 73.37,142.602 74.191,143.407 74.191,146.499 USB2.7@72.953,147.479
USB1_REXT: R52.2 U1.122 | length 4.3
  Top Layer w0.254: U1.122@97.82,115.199 R52.2@97.82,119.494
USB2_2: R53.1 USB2.2 | length 4.4
  Top Layer w0.254: USB2.2@75.554,149.48 77.459,149.481 R53.1@79.24,147.7
USB2_3: R54.1 USB2.3 | length 4.4
  Top Layer w0.254: USB2.3@75.554,147.479 77.341,147.479 R54.1@79.22,145.6
X2_IN: C47.2 U1.40 X2.1 | length 10.7
  Top Layer w0.25: C47.2@92.58,96.164 94.193,96.163 93.774,95.744 X2.1@93.932,95.744 93.614,95.744 94.671,96.801 97.81,96.801 98.222,97.212 U1.40@98.222,100.006
X2_OUT: C48.2 U1.41 X2.2 | length 5.5
  Top Layer w0.25: X2.2@97.229,95.696 97.229,96.029 98.199,96.029 98.623,96.453 U1.41@98.623,100.006
X_IN: C49.2 R55.1 U1.103 X3.1 | length 11
  Top Layer w0.254: U1.103@105.423,115.206 105.423,116.722 107.681,118.978 R55.1@107.681,119.577
  Top Layer w0.28: R55.1@107.679,119.578 107.678,122.079 108.12,122.518 108.481,122.518 108.781,122.821 110.124,122.82 C49.2@110.46,122.484
X_OUT: C46.2 R55.2 U1.104 X3.3 | length 8.7
  Top Layer w0.254: U1.104@105.023,115.206 105.023,116.916 106.846,118.789 R55.2@106.832,119.578
  Top Layer w0.28: C46.2@104.86,121.596 106.204,121.596 X3.3@106.58,121.22 106.831,120.969 R55.2@106.831,119.578
XTAL1: C41.2 R50.1 U5.5 X1.1 | length 9.8
  Top Layer w0.24: 86.096,133.887 87.127,134.919 89.266,134.919 89.57,134.614 R50.1@89.996,134.614
  Top Layer w0.25: R50.1@89.996,134.614 89.996,134.633 U5.5@93.64,134.633
  Top Layer w0.28: 86.096,133.889 86.096,132.5 C41.2@86.308,132.288
XTAL2: C40.1 R50.2 U5.4 X1.3 | length 7.8
  Top Layer w0.24: X1.3@88.3,135.72 89.365,135.72 89.622,135.463 R50.2@89.996,135.463
  Top Layer w0.25: R50.2@89.996,135.463 90.422,135.463 90.751,135.133 U5.4@93.64,135.133
  Top Layer w0.28: C40.1@87.76,137.72 87.76,136.26 X1.3@88.3,135.72
pads on no net: B1.0 RJ1.15 RJ1.16 TF_CARD1.
copper on no net:
  other v1: 123.08,90.7

## Polygon pours and split planes (outlines as drawn)
GND on Bottom Layer (solid): 38.14,203.28 153.96,203.54 154.22,54.18 38.14,54.7 38.1,203.24
GND on Top Layer (solid): 50.44,187.2 166.26,187.46 166.52,38.1 50.44,38.62 50.4,187.16

## Silkscreen, mask and mechanical layers (free items; w line width, h text height)
Top Overlay:
  text "G R T" at 131.419,141.571 h1.5
  text "3.3V RXD / GND TXD" at 112.415,131.699 h0.8 r90
  text "PG5(UART0MSG) / PG3(WTD) / PG8 / PG9" at 73.979,88.247 h1.4 r90
  text "BOOT1 / BOOT0" at 129.202,76.02 h1.4 r90
Bottom Overlay:
  text "Galaxy NUC980DK61 Dev Board 1.3(201906)" at 122.256,167.249 h1.5
  text "PG0(BOOT) / PG1(BOOT)" at 124.574,84.075 h1.4 r270

## Text inside footprints (layer, text, board x,y; h text height)
SW1: Top Overlay "ON" at 71.703,81.062 h0.5; Top Overlay "1" at 72.973,76.482 h0.5 r180; Top Overlay "2" at 75.513,76.5 h0.5 r180; Top Overlay "3" at 78.053,76.5 h0.5 r180; Top Overlay "4" at 80.61,76.437 h0.5 r145
SW2: Top Overlay "ON" at 121.513,81.212 h0.5; Top Overlay "1" at 122.783,76.632 h0.5 r180; Top Overlay "2" at 125.323,76.65 h0.5 r180